# Altium PCB SignControlSchematic_v0.PcbDoc
Units mil, origin at the board's own origin, x right, y up, seen from the top; angles counter-clockwise.
Board outline 3938 x 3150 mil, 2 copper layers (Top, Bottom), stack 61.811 mil thick; 66 components, 135 nets, 377 pads, 0 vias.
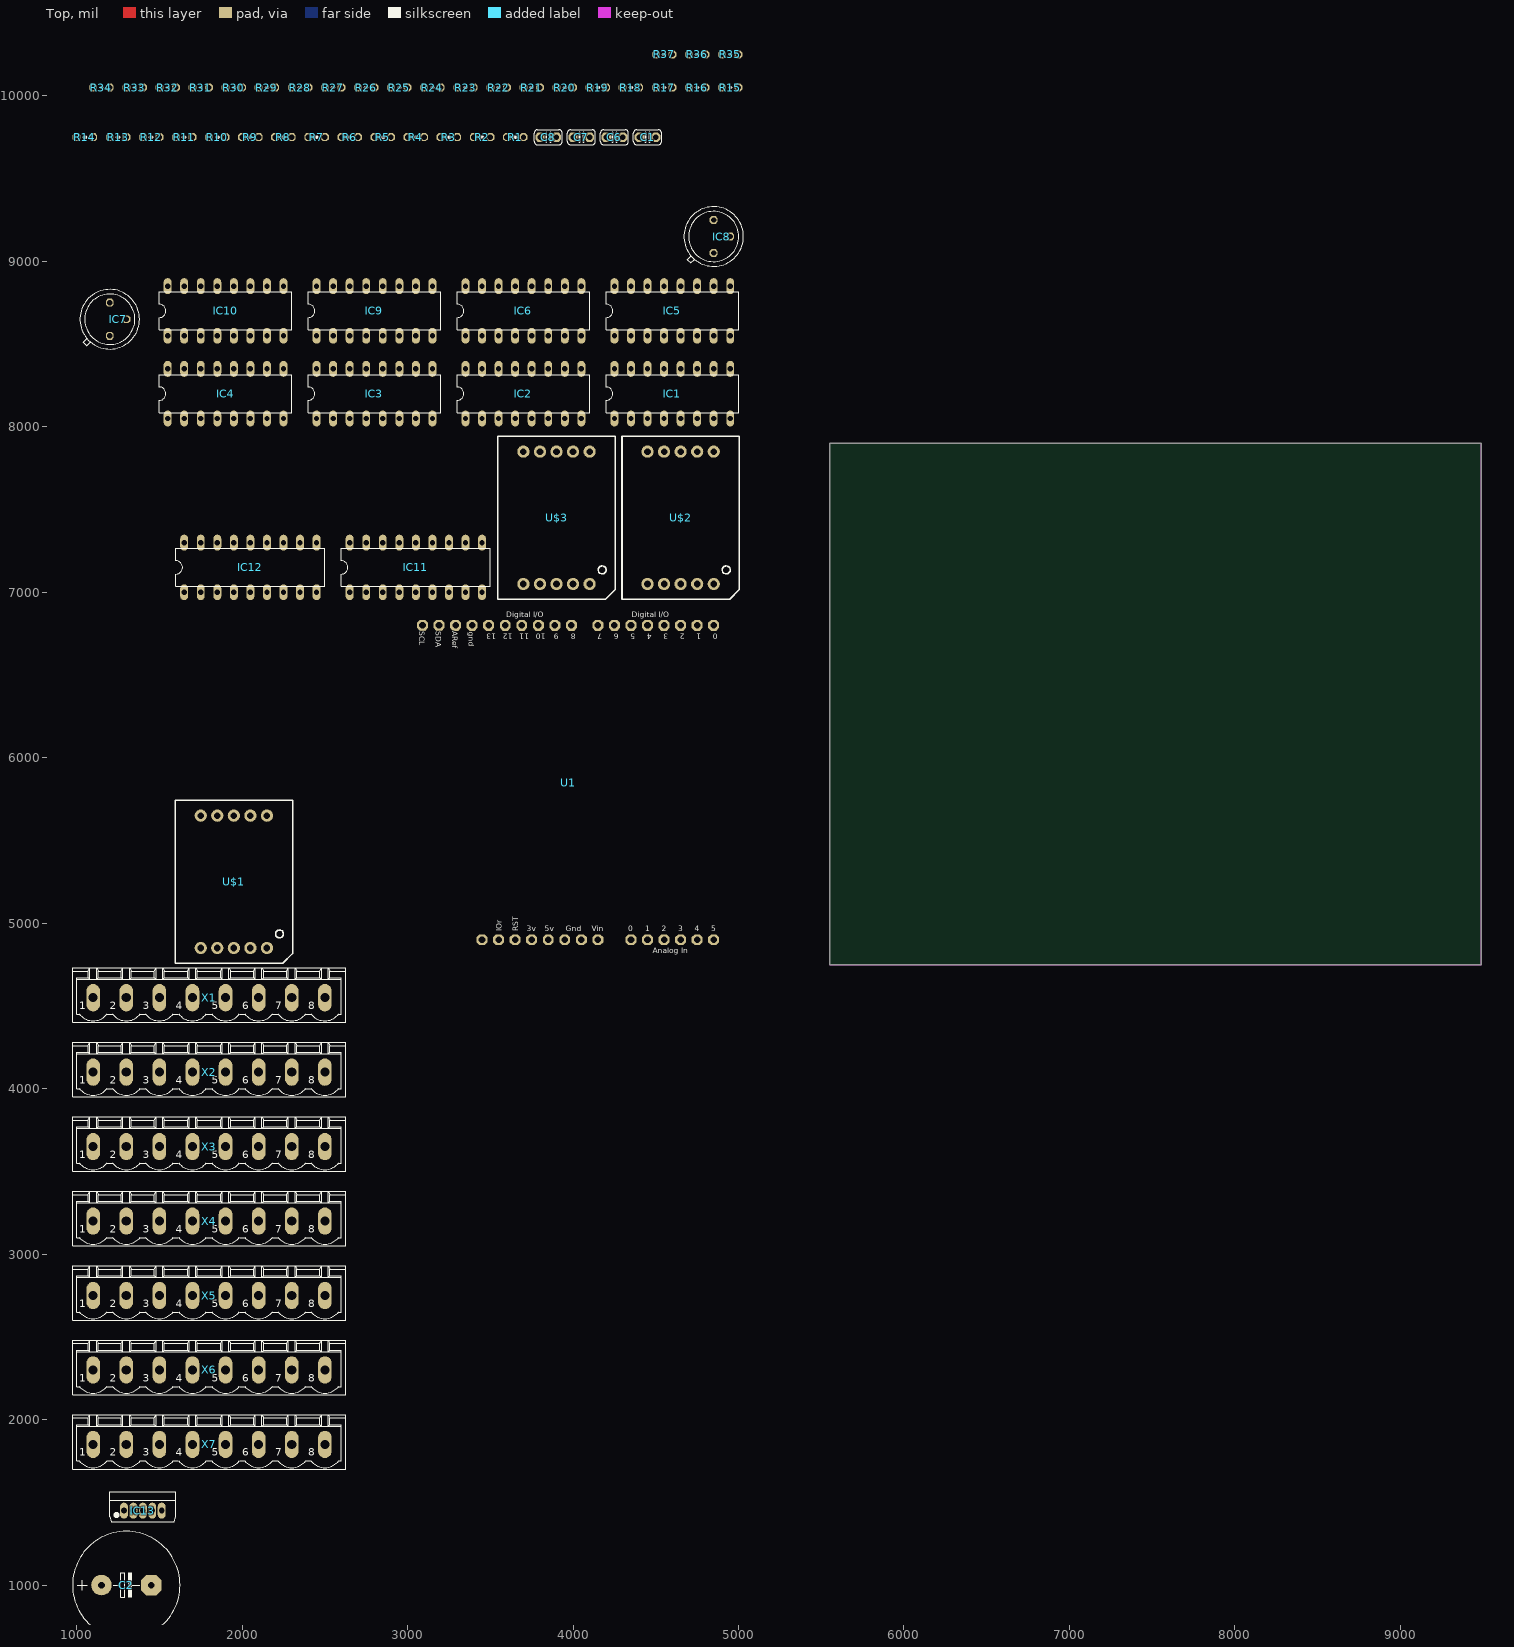
[diagram p0: Top view]
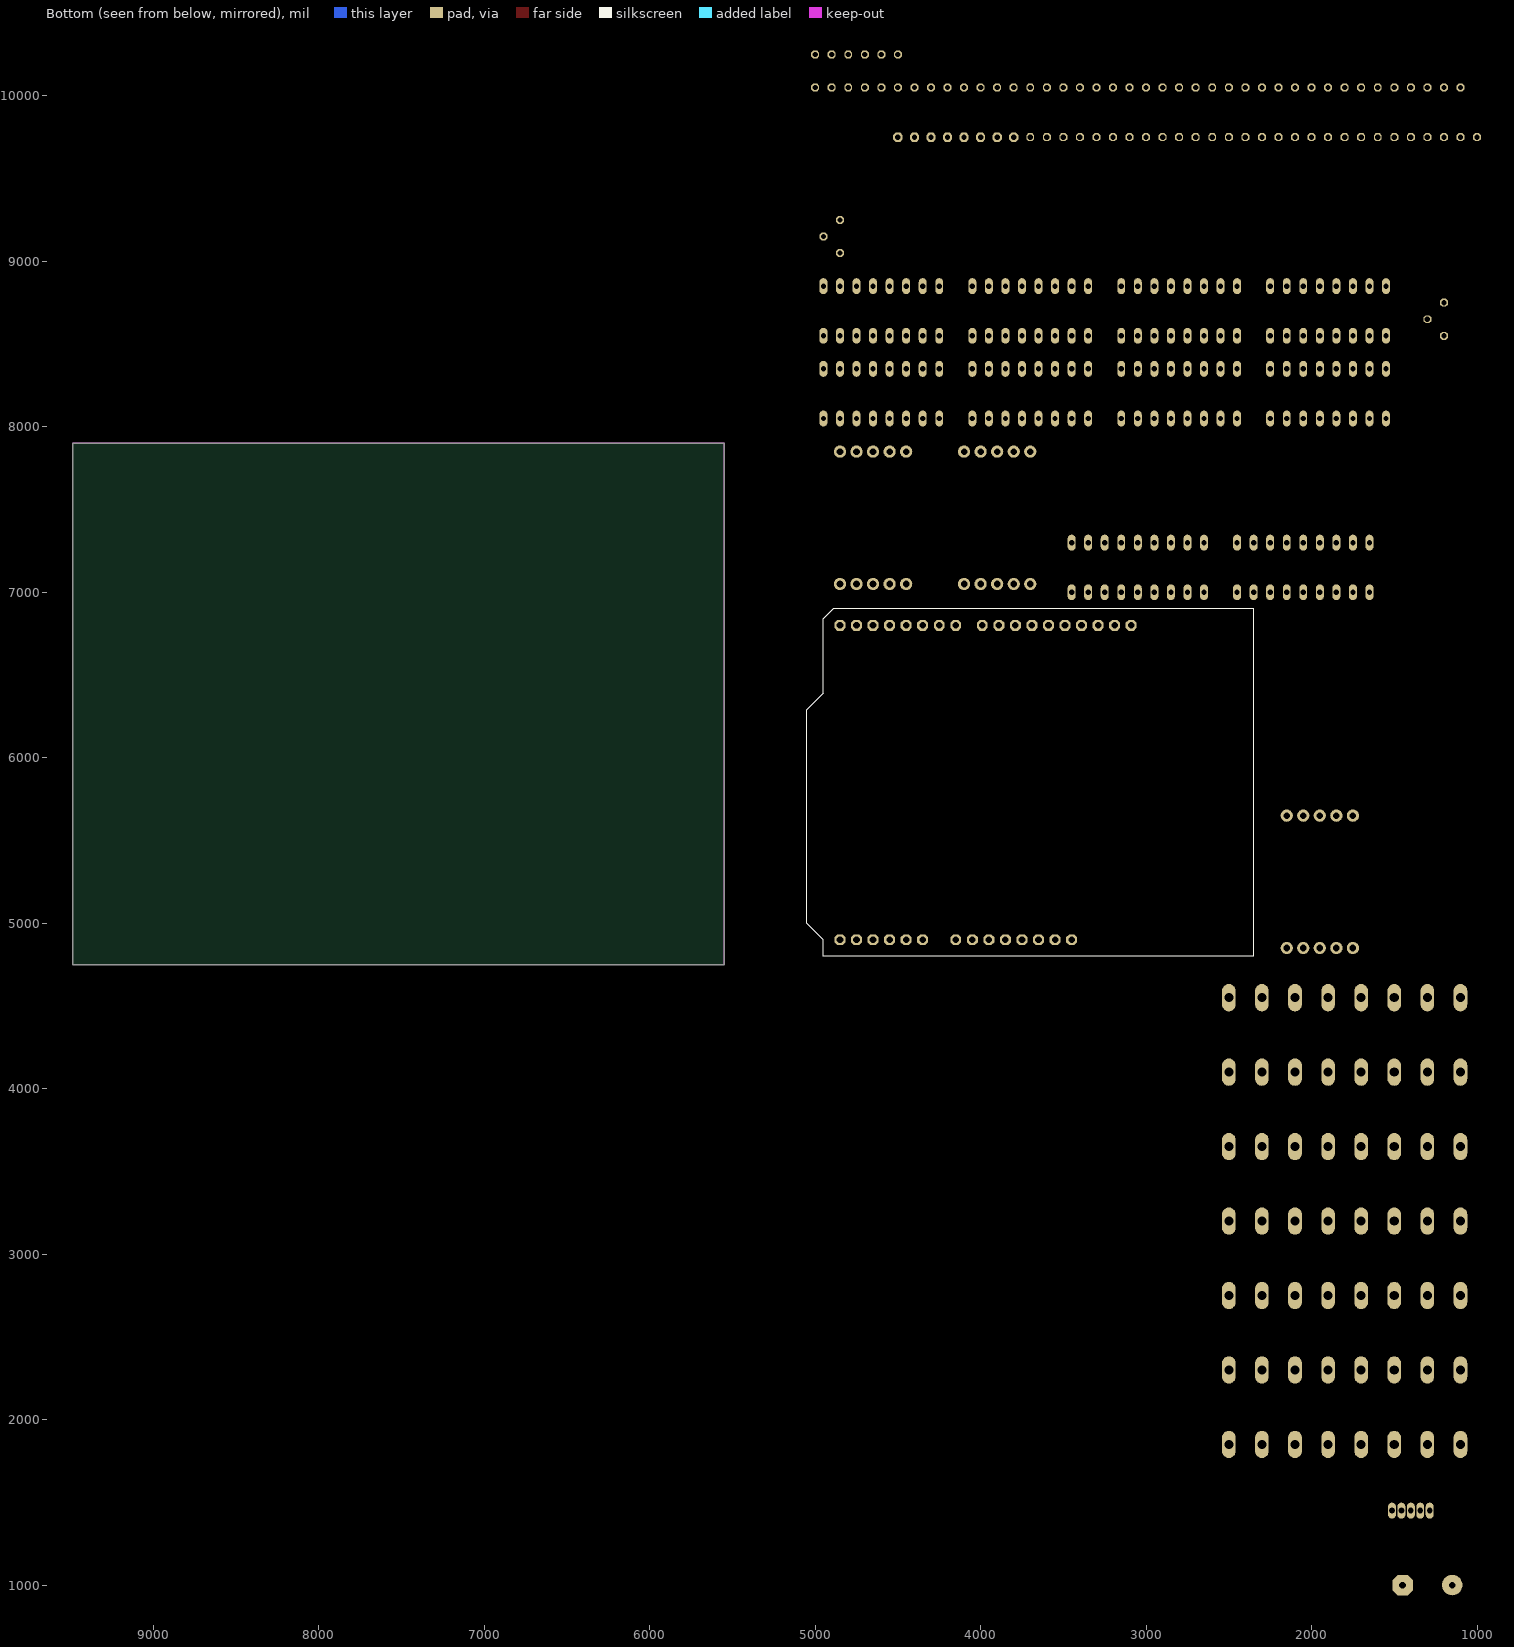
[diagram p1: Bottom view, seen from below]

## Layer stack, top to bottom
Top Solder: solder mask 0.4, Solder Resist, Dk 3.5
Top: signal copper 1.378
Dielectric 1: core 59.0551, FR-4, Dk 4.8
Bottom: signal copper 1.378
Bottom Solder: solder mask 0.4, Solder Resist, Dk 3.5

## Board outline
5550,4750 9488,4750 9488,7900 5550,7900

## Design rules (kind name [scope] priority, off if disabled: settings)
Clearance mdViaVia [IsVia vs IsVia] p1: gap=8
Clearance mdPadVia [IsPad vs IsVia] p2: gap=8
Clearance mdPadPad [IsPad vs IsPad] p3: gap=8
Clearance mdWireVia [(InLayerClass('Signal Layers') AND IsTrack) vs IsVia] p4: gap=8
Clearance mdWirePad [(InLayerClass('Signal Layers') AND IsTrack) vs IsPad] p5: gap=8
Clearance mdWireWire [(InLayerClass('Signal Layers') AND IsTrack) vs (InLayerClass('Signal Layers') AND IsTrack)] p6: gap=8
Clearance [All] p7: gap=8
HoleSize [All] p1: absolutevalues=TRUE maxlimit=100000 minlimit=24 maxpercent=80.000 minpercent=20.000
HoleToHoleClearance [All] p1: gap=8 allowstackedmicrovias=TRUE
PolygonConnect ThermalVias [IsVia] p1: connectstyle=Direct reliefconductorwidth=10 reliefentries=4 polygonreliefangle="90 Angle" airgapwidth=10
PolygonConnect [All] p2: connectstyle=Relief reliefconductorwidth=10 reliefentries=4 polygonreliefangle="90 Angle" airgapwidth=10
RoutingVias [All] p1: holewidth=28 width=50 viastyle="Through Hole" minholewidth=28 minwidth=50 maxholewidth=28 maxwidth=50
SilkToSilkClearance [All] p1 off: silktosilkclearance=10
SilkToSolderMaskClearance [IsPad] p1 off: minsilkscreentomaskgap=10 clearancetoexposedcopper=TRUE
SolderMaskExpansion [All] p1: expansion=4
Width [All] p1: maxlimit=100000 minlimit=10 preferedwidth=10
26 further rules are at their usual default settings.

## Components (designator, comment, footprint, x,y, rotation, side; value= is the part's Value field where it differs from the comment)
C1 "" C025-024X044 4450,9750 r0 top
C2 "" E7,5-16 1300,1000 r0 top
C6 "" C025-024X044 4250,9750 r0 top
C7 "" C025-024X044 4050,9750 r0 top
C8 "" C025-024X044 3850,9750 r0 top
IC1 "" DIL16 4600,8200 r0 top
IC2 "" DIL16 3700,8200 r0 top
IC3 "" DIL16 2800,8200 r0 top
IC4 "" DIL16 1900,8200 r0 top
IC5 "" DIL16 4600,8700 r0 top
IC6 "" DIL16 3700,8700 r0 top
IC7 "" TO39 1200,8650 r0 top
IC8 "" TO39 4850,9150 r0 top
IC9 "" DIL16 2800,8700 r0 top
IC10 "" DIL16 1900,8700 r0 top
IC11 "" DIL18 3050,7150 r0 top
IC12 "" DIL18 2050,7150 r0 top
IC13 "" TO-220-5_IN-LINE 1400,1450 r0 top
R1 "" 0204V 3650,9750 r0 top
R2 "" 0204V 3450,9750 r0 top
R3 "" 0204V 3250,9750 r0 top
R4 "" 0204V 3050,9750 r0 top
R5 "" 0204V 2850,9750 r0 top
R6 "" 0204V 2650,9750 r0 top
R7 "" 0204V 2450,9750 r0 top
R8 "" 0204V 2250,9750 r0 top
R9 "" 0204V 2050,9750 r0 top
R10 "" 0204V 1850,9750 r0 top
R11 "" 0204V 1650,9750 r0 top
R12 "" 0204V 1450,9750 r0 top
R13 "" 0204V 1250,9750 r0 top
R14 "" 0204V 1050,9750 r0 top
R15 "" 0204V 4950,10050 r0 top
R16 "" 0204V 4750,10050 r0 top
R17 "" 0204V 4550,10050 r0 top
R18 "" 0204V 4350,10050 r0 top
R19 "" 0204V 4150,10050 r0 top
R20 "" 0204V 3950,10050 r0 top
R21 "" 0204V 3750,10050 r0 top
R22 "" 0204V 3550,10050 r0 top
R23 "" 0204V 3350,10050 r0 top
R24 "" 0204V 3150,10050 r0 top
R25 "" 0204V 2950,10050 r0 top
R26 "" 0204V 2750,10050 r0 top
R27 "" 0204V 2550,10050 r0 top
R28 "" 0204V 2350,10050 r0 top
R29 "" 0204V 2150,10050 r0 top
R30 "" 0204V 1950,10050 r0 top
R31 "" 0204V 1750,10050 r0 top
R32 "" 0204V 1550,10050 r0 top
R33 "" 0204V 1350,10050 r0 top
R34 "" 0204V 1150,10050 r0 top
R35 "" 0204V 4950,10250 r0 top
R36 "" 0204V 4750,10250 r0 top
R37 "" 0204V 4550,10250 r0 top
U1 "" ARDUINOR3-BPLACE 2350,4800 r0 top
U$1 "" "7-SEGMENT-1\"PTH" 1950,5250 r0 top
U$2 "" "7-SEGMENT-1\"PTH" 4650,7450 r0 top
U$3 "" "7-SEGMENT-1\"PTH" 3900,7450 r0 top
X1 "" MSTBV8 1800,4550 r0 top
X2 "" MSTBV8 1800,4100 r0 top
X3 "" MSTBV8 1800,3650 r0 top
X4 "" MSTBV8 1800,3200 r0 top
X5 "" MSTBV8 1800,2750 r0 top
X6 "" MSTBV8 1800,2300 r0 top
X7 "" MSTBV8 1800,1850 r0 top

## Footprints (in the part's own frame and the unit in brackets; to place one, negate y for a bottom-side part, rotate by r counter-clockwise, add the part's x,y. Pads: shape width x height; smd on the part's side, far side on the other; paste and mask are expansions set on the pad)
"7-SEGMENT-1\"PTH" [mil] "7-SEGMENT-1\"PTH"
  round 74 hole 40: 1(-200,-400) 2(-100,-400) 3(0,-400) 4(100,-400) 5(200,-400) 6(200,400) 7(100,400) 8(0,400) 9(-100,400) 10(-200,400)
  silkscreen extent -354,-492 355,493
0204V [mil] "0204V"
  oct 48x48 hole 32: 1(-50,0) 2(50,0)
  silkscreen extent -5,0 5,0
ARDUINOR3-BPLACE [mil] "ARDUINOR3-BPLACE"
  oct 66x66 hole 40: 3V(1400,100) 5V(1500,100) A0(2000,100) A1(2100,100) A2(2200,100) A3(2300,100) A4(2400,100) A5(2500,100) AREF(940,2000) D0(2500,2000) D1(2400,2000) D2(2300,2000) D3(2200,2000) D4(2100,2000) D5(2000,2000) D6(1900,2000) D7(1800,2000) D8(1640,2000) D9(1540,2000) D10(1440,2000) D11(1340,2000) D12(1240,2000) D13(1140,2000) GND(1040,2000) GND1(1700,100) GND2(1600,100) IOREF(1200,100) RESERVED(1100,100) RESET(1300,100) SCL(740,2000) SDA(840,2000) VIN(1800,100)
C025-024X044 [mil] "C025-024X044"
  oct 56x56 hole 32: 1(-50,0) 2(50,0)
  silkscreen extent -85,-45 85,45
DIL16 [mil] "DIL16"
  oval 48x96 hole 32: 1(-350,-150) 2(-250,-150) 3(-150,-150) 4(-50,-150) 5(50,-150) 6(150,-150) 7(250,-150) 8(350,-150) 9(350,150) 10(250,150) 11(150,150) 12(50,150) 13(-50,150) 14(-150,150) 15(-250,150) 16(-350,150)
  silkscreen extent -400,-115 400,115
DIL18 [mil] "DIL18"
  oval 48x96 hole 32: 1(-400,-150) 2(-300,-150) 3(-200,-150) 4(-100,-150) 5(0,-150) 6(100,-150) 7(200,-150) 8(300,-150) 9(400,-150) 10(400,150) 11(300,150) 12(200,150) 13(100,150) 14(0,150) 15(-100,150) 16(-200,150) 17(-300,150) 18(-400,150)
  silkscreen extent -450,-115 450,115
E7,5-16 [mil] "E7,5-16"
  round 124 hole 40: +(-150,0)
  oct 124x124 hole 40: -(150,0)
  silkscreen extent -325,-325 325,325
MSTBV8 [mil] "MSTBV8"
  oval 82.5x165 hole 55: 1(-700,0) 2(-500,0) 3(-300,0) 4(-100,0) 5(100,0) 6(300,0) 7(500,0) 8(700,0)
  silkscreen extent -825,-150 825,180
TO39 [mil] "TO39"
  oct 48x48 hole 32: 1(0,-100) 2(100,0) 3(0,100)
  silkscreen extent -180,-180 180,180
TO-220-5_IN-LINE [mil] "TO-220-5_IN-LINE"
  oval 48x96 hole 35: P$1(-114,0) P$2(-57,0) P$3(0,0) P$4(57,0) P$5(114,0)
  silkscreen extent -200,-67 200,113

## Part data
C1 C6 C7 C8: library part C025-024X044
C2: library part E7,5-16
IC1 IC2 IC3 IC4 IC5 IC6 IC9 IC10: library part DIL16
IC7 IC8: library part TO39
IC11 IC12: library part DIL18
IC13: library part TO-220-5_IN-LINE
R1 R2 R3 R4 R5 R6 R7 R8 R9 R10 R11 R12 R13 R14 R15 R16 R17 R18 R19 R20 R21 R22 R23 R24 R25 R26 R27 R28 R29 R30 R31 R32 R33 R34 R35 R36 R37: library part 0204V
U1: library part ARDUINOR3-BPLACE
U$1 U$2 U$3: library part "7-SEGMENT-1\"PTH"
X1 X2 X3 X4 X5 X6 X7: library part MSTBV8

## Nets (pads, with @x,y where several pads share a name; then routed paths per layer and width w, separated by ;. In a path a pad name is that pad's centre, name@x,y a point inside that pad or via, vN(x,y) a via of type N, cw(c..) or ccw(c..) an arc to the next point about the centre after c; other vN are vias at no path point)
3V: U1.3V
5V: C8.1 IC8.2 U1.5V U1.VIN
12V: C6.1 IC7.2 X2.1 X2.2 X2.3 X2.4 X2.5 X2.6 X2.7 X2.8 X4.1 X4.2 X4.3 X4.4 X4.5 X4.7 X4.8 X5.8 X6.8
A: IC1.5 IC3.5 IC5.5 U1.D0
B: IC1.3 IC3.3 IC5.3 U1.D1
BAT+: C1.1 C7.1 IC7.1 IC8.1
BL: IC1.7 IC3.7 IC5.7 U1.D4
C: IC1.2 IC3.2 IC5.2 U1.D2
D: IC1.4 IC3.4 IC5.4 U1.D3
GND: C1.2 C2.- C6.2 C7.2 C8.2 IC1.6 IC2.8 IC3.6 IC4.8 IC5.6 IC6.8 IC7.3 IC8.3 IC9.8 IC9.13 IC10.8 IC10.13 IC11.9 IC12.9 IC13.P$3 IC13.P$5 U1.GND
GND1: U1.GND1
GND2: U1.GND2
LD0: IC1.1 U1.D5
LD1: IC3.1 U1.D6
LD2: IC5.1 U1.D7
N$1: IC1.9 IC2.1
N$2: IC2.16 R1.1
N$3: IC1.10 IC2.2
N$4: R1.2 X5.1
N$5: IC1.11 IC2.3
N$6: IC2.15 R2.1
N$7: IC1.12 IC2.4
N$8: R2.2 X5.2
N$9: IC1.13 IC2.5
N$10: IC2.14 R3.1
N$11: IC1.15 IC2.6
N$12: IC1.14 IC2.7
N$13: R3.2 X5.3
N$14: R4.2 X5.4
N$15: IC3.9 IC4.1
N$16: IC2.13 R4.1
N$17: IC3.10 IC4.2
N$18: IC2.12 R5.1
N$19: IC3.11 IC4.3
N$20: R5.2 X5.5
N$21: IC3.12 IC4.4
N$22: R6.2 X5.6
N$23: IC3.13 IC4.5
N$24: IC2.11 R6.1
N$25: IC3.15 IC4.6
N$26: IC3.14 IC4.7
N$27: IC2.10 R7.1
N$28: R7.2 X5.7
N$29: IC5.9 IC6.1
N$30: IC4.16 R8.1
N$31: IC5.10 IC6.2
N$32: R8.2 X6.1
N$33: IC5.11 IC6.3
N$34: R9.2 X6.2
N$35: IC5.12 IC6.4
N$36: IC4.15 R9.1
N$37: IC5.13 IC6.5
N$38: IC4.14 R10.1
N$39: IC5.15 IC6.6
N$40: IC5.14 IC6.7
N$41: R10.2 X6.3
N$42: R11.2 X6.4
N$43: IC4.13 R11.1
N$44: IC4.12 R12.1
N$45: R12.2 X6.5
N$46: R13.2 X6.6
N$47: IC4.11 R13.1
N$48: IC4.10 R14.1
N$49: R14.2 X6.7
N$50: IC6.16 R15.1
N$51: R15.2 X7.1
N$52: X7.2
N$53: IC6.15 R16.1
N$54: IC6.14 R17.1
N$55: R17.2 X7.3
N$56: R18.2
N$57: IC6.13 R18.1
N$58: IC6.12 R19.1
N$59: R19.2 X7.5
N$60: R20.2 X7.6
N$61: IC6.11 R20.1
N$62: IC6.10 R21.1
N$63: R21.2 X7.7
N$64: R22.2 X3.1
N$65: R23.2 X3.2
N$66: R24.2 X3.3
N$67: R25.2 X3.4
N$68: R26.2 X3.5
N$69: R27.2 X3.6
N$70: R28.2 X3.7
N$71: R29.2 X3.8
N$72: R30.2 X1.1
N$73: R31.2 X1.2
N$74: R32.2 X1.3
N$75: R33.2 X1.4
N$76: R34.2 X1.5
N$77: R35.2 X1.6
N$78: R36.2 X1.7
N$79: R37.2 X1.8
N$80: IC11.18 R22.1
N$81: IC11.17 R23.1
N$82: IC11.16 R24.1
N$83: IC11.15 R25.1
N$84: IC11.14 R26.1
N$85: IC11.13 R27.1
N$86: IC11.12 R28.1
N$87: IC11.11 R29.1
N$88: IC12.18 R30.1
N$89: IC12.17 R31.1
N$90: IC12.16 R32.1
N$91: IC12.15 R33.1
N$92: IC12.14 R34.1
N$93: IC12.13 R35.1
N$94: IC12.12 R36.1
N$95: IC12.11 R37.1
N$96: IC9.9 IC10.14
N$97: IC9.15 IC11.1
N$98: IC9.1 IC11.2
N$99: IC9.2 IC11.3
N$100: IC9.3 IC11.4
N$101: IC9.4 IC11.5
N$102: IC9.5 IC11.6
N$103: IC9.6 IC11.7
N$104: IC9.7 IC11.8
N$105: IC10.15 IC12.1
N$106: IC10.1 IC12.2
N$107: IC10.2 IC12.3
N$108: IC10.3 IC12.4
N$109: IC10.4 IC12.5
N$110: IC10.5 IC12.6
N$111: IC10.6 IC12.7
N$112: IC10.7 IC12.8
N$113: C2.+ IC13.P$1
RCK: IC9.12 IC10.12 U1.D11
SCK: IC9.11 IC10.11 U1.D9
SCL: IC9.10 IC10.10 U1.D10
SER: IC9.14 U1.D8
VCC: IC9.16 IC10.16
VDD: IC1.16 IC3.16 IC5.16
VSS: IC1.8 IC3.8 IC5.8
pads on no net: IC2.9 IC4.9 IC6.9 IC10.9 IC11.10 IC12.10 IC13.P$2 IC13.P$4 R16.2 U1.A0 U1.A1 U1.A2 U1.A3 U1.A4 U1.A5 U1.AREF U1.D12 U1.D13 U1.IOREF U1.RESERVED U1.RESET U1.SCL U1.SDA U$1.1 U$1.2 U$1.3 U$1.4 U$1.5 U$1.6 U$1.7 U$1.8 U$1.9 U$1.10 U$2.1 U$2.2 U$2.3 U$2.4 U$2.5 U$2.6 U$2.7 U$2.8 U$2.9 U$2.10 U$3.1 U$3.2 U$3.3 U$3.4 U$3.5 U$3.6 U$3.7 U$3.8 U$3.9 U$3.10 X4.6 X7.4 X7.8

## Keep-outs
Keep-Out Layer:
  the board outline again, w0

## Silkscreen, mask and mechanical layers (free items; w line width, h text height)
Dimension:
  the board outline again, w0
Unrouted:
  drawing of 186 lines, arcs and shapes, not listed

## Text inside footprints (layer, text, board x,y; h text height)
C1: tNames ">NAME" at 4380,9805 h77.5; tValues ">VALUE" at 4380,9645 h77.5
C2: tNames ">NAME" at 1610,1150 h108.5; tValues ">VALUE" at 1100,831 h108.5
C6: tNames ">NAME" at 4180,9805 h77.5; tValues ">VALUE" at 4180,9645 h77.5
C7: tNames ">NAME" at 3980,9805 h77.5; tValues ">VALUE" at 3980,9645 h77.5
C8: tNames ">NAME" at 3780,9805 h77.5; tValues ">VALUE" at 3780,9645 h77.5
IC1: tNames ">NAME" at 4185,8085 h77.5 r90; tValues ">VALUE" at 4305,8175 h77.5
IC2: tNames ">NAME" at 3285,8085 h77.5 r90; tValues ">VALUE" at 3405,8175 h77.5
IC3: tNames ">NAME" at 2385,8085 h77.5 r90; tValues ">VALUE" at 2505,8175 h77.5
IC4: tNames ">NAME" at 1485,8085 h77.5 r90; tValues ">VALUE" at 1605,8175 h77.5
IC5: tNames ">NAME" at 4185,8585 h77.5 r90; tValues ">VALUE" at 4305,8675 h77.5
IC6: tNames ">NAME" at 3285,8585 h77.5 r90; tValues ">VALUE" at 3405,8675 h77.5
IC7: tNames ">NAME" at 1090,8840 h77.5; tValues ">VALUE" at 1070,8625 h77.5
IC8: tNames ">NAME" at 4740,9340 h77.5; tValues ">VALUE" at 4720,9125 h77.5
IC9: tNames ">NAME" at 2385,8585 h77.5 r90; tValues ">VALUE" at 2505,8675 h77.5
IC10: tNames ">NAME" at 1485,8585 h77.5 r90; tValues ">VALUE" at 1605,8675 h77.5
IC11: tNames ">NAME" at 2590,7030 h77.5 r90; tValues ">VALUE" at 2675,7125 h77.5
IC12: tNames ">NAME" at 1590,7030 h77.5 r90; tValues ">VALUE" at 1675,7125 h77.5
IC13: tNames ">NAME" at 975,1475 h42.5; tValues ">VALUE" at 1275,1325 h42.5
R1: tNames ">NAME" at 3566,9796 h77.5; tValues ">VALUE" at 3566,9659 h77.5
R2: tNames ">NAME" at 3366,9796 h77.5; tValues ">VALUE" at 3366,9659 h77.5
R3: tNames ">NAME" at 3166,9796 h77.5; tValues ">VALUE" at 3166,9659 h77.5
R4: tNames ">NAME" at 2966,9796 h77.5; tValues ">VALUE" at 2966,9659 h77.5
R5: tNames ">NAME" at 2766,9796 h77.5; tValues ">VALUE" at 2766,9659 h77.5
R6: tNames ">NAME" at 2566,9796 h77.5; tValues ">VALUE" at 2566,9659 h77.5
R7: tNames ">NAME" at 2366,9796 h77.5; tValues ">VALUE" at 2366,9659 h77.5
R8: tNames ">NAME" at 2166,9796 h77.5; tValues ">VALUE" at 2166,9659 h77.5
R9: tNames ">NAME" at 1966,9796 h77.5; tValues ">VALUE" at 1966,9659 h77.5
R10: tNames ">NAME" at 1766,9796 h77.5; tValues ">VALUE" at 1766,9659 h77.5
R11: tNames ">NAME" at 1566,9796 h77.5; tValues ">VALUE" at 1566,9659 h77.5
R12: tNames ">NAME" at 1366,9796 h77.5; tValues ">VALUE" at 1366,9659 h77.5
R13: tNames ">NAME" at 1166,9796 h77.5; tValues ">VALUE" at 1166,9659 h77.5
R14: tNames ">NAME" at 966,9796 h77.5; tValues ">VALUE" at 966,9659 h77.5
R15: tNames ">NAME" at 4866,10096 h77.5; tValues ">VALUE" at 4866,9959 h77.5
R16: tNames ">NAME" at 4666,10096 h77.5; tValues ">VALUE" at 4666,9959 h77.5
R17: tNames ">NAME" at 4466,10096 h77.5; tValues ">VALUE" at 4466,9959 h77.5
R18: tNames ">NAME" at 4266,10096 h77.5; tValues ">VALUE" at 4266,9959 h77.5
R19: tNames ">NAME" at 4066,10096 h77.5; tValues ">VALUE" at 4066,9959 h77.5
R20: tNames ">NAME" at 3866,10096 h77.5; tValues ">VALUE" at 3866,9959 h77.5
R21: tNames ">NAME" at 3666,10096 h77.5; tValues ">VALUE" at 3666,9959 h77.5
R22: tNames ">NAME" at 3466,10096 h77.5; tValues ">VALUE" at 3466,9959 h77.5
R23: tNames ">NAME" at 3266,10096 h77.5; tValues ">VALUE" at 3266,9959 h77.5
R24: tNames ">NAME" at 3066,10096 h77.5; tValues ">VALUE" at 3066,9959 h77.5
R25: tNames ">NAME" at 2866,10096 h77.5; tValues ">VALUE" at 2866,9959 h77.5
R26: tNames ">NAME" at 2666,10096 h77.5; tValues ">VALUE" at 2666,9959 h77.5
R27: tNames ">NAME" at 2466,10096 h77.5; tValues ">VALUE" at 2466,9959 h77.5
R28: tNames ">NAME" at 2266,10096 h77.5; tValues ">VALUE" at 2266,9959 h77.5
R29: tNames ">NAME" at 2066,10096 h77.5; tValues ">VALUE" at 2066,9959 h77.5
R30: tNames ">NAME" at 1866,10096 h77.5; tValues ">VALUE" at 1866,9959 h77.5
R31: tNames ">NAME" at 1666,10096 h77.5; tValues ">VALUE" at 1666,9959 h77.5
R32: tNames ">NAME" at 1466,10096 h77.5; tValues ">VALUE" at 1466,9959 h77.5
R33: tNames ">NAME" at 1266,10096 h77.5; tValues ">VALUE" at 1266,9959 h77.5
R34: tNames ">NAME" at 1066,10096 h77.5; tValues ">VALUE" at 1066,9959 h77.5
R35: tNames ">NAME" at 4866,10296 h77.5; tValues ">VALUE" at 4866,10159 h77.5
R36: tNames ">NAME" at 4666,10296 h77.5; tValues ">VALUE" at 4666,10159 h77.5
R37: tNames ">NAME" at 4466,10296 h77.5; tValues ">VALUE" at 4466,10159 h77.5
U1: Top Overlay "RST" at 3670,4950 h34 r90; Top Overlay "3v" at 3719,4950 h34; Top Overlay "5v" at 3829,4950 h34; Top Overlay "Gnd" at 3956,4950 h34; Top Overlay "Vin" at 4114,4950 h34; Top Overlay "Analog In" at 4481,4819 h34; Top Overlay "0" at 4335,4950 h34; Top Overlay "1" at 4435,4950 h34; Top Overlay "2" at 4535,4950 h34; Top Overlay "3" at 4635,4950 h34; Top Overlay "4" at 4735,4950 h34; Top Overlay "5" at 4835,4950 h34; Top Overlay "ARef" at 3270,6765 h34 r270; Top Overlay "gnd" at 3370,6760 h34 r270; Top Overlay "13" at 3535,6750 h34 r180; Top Overlay "12" at 3635,6750 h34 r180; Top Overlay "11" at 3735,6750 h34 r180; Top Overlay "10" at 3835,6750 h34 r180; Top Overlay "9" at 3915,6750 h34 r180; Top Overlay "8" at 4015,6750 h34 r180; Top Overlay "7" at 4175,6750 h34 r180; Top Overlay "6" at 4275,6750 h34 r180; Top Overlay "5" at 4375,6750 h34 r180; Top Overlay "4" at 4475,6750 h34 r180; Top Overlay "3" at 4575,6750 h34 r180; Top Overlay "2" at 4675,6750 h34 r180; Top Overlay "1" at 4775,6750 h34 r180; Top Overlay "0" at 4875,6750 h34 r180; Top Overlay "Digital I/O" at 3595,6850 h34; Top Overlay "Digital I/O" at 4355,6850 h34; Top Overlay "SCL" at 3070,6765 h34 r270; Top Overlay "SDA" at 3170,6765 h34 r270; Top Overlay "IOr" at 3570,4950 h34 r90
X1: tNames ">NAME" at 975,4310 h108.5; tValues ">VALUE" at 1300,4310 h108.5; Top Overlay "1" at 1015,4465 h77.5; Top Overlay "2" at 1200,4465 h77.5; Top Overlay "3" at 1400,4465 h77.5; Top Overlay "4" at 1600,4465 h77.5; Top Overlay "5" at 1815,4465 h77.5; Top Overlay "6" at 2000,4465 h77.5; Top Overlay "7" at 2200,4465 h77.5; Top Overlay "8" at 2400,4465 h77.5
X2: tNames ">NAME" at 975,3860 h108.5; tValues ">VALUE" at 1300,3860 h108.5; Top Overlay "1" at 1015,4015 h77.5; Top Overlay "2" at 1200,4015 h77.5; Top Overlay "3" at 1400,4015 h77.5; Top Overlay "4" at 1600,4015 h77.5; Top Overlay "5" at 1815,4015 h77.5; Top Overlay "6" at 2000,4015 h77.5; Top Overlay "7" at 2200,4015 h77.5; Top Overlay "8" at 2400,4015 h77.5
X3: tNames ">NAME" at 975,3410 h108.5; tValues ">VALUE" at 1300,3410 h108.5; Top Overlay "1" at 1015,3565 h77.5; Top Overlay "2" at 1200,3565 h77.5; Top Overlay "3" at 1400,3565 h77.5; Top Overlay "4" at 1600,3565 h77.5; Top Overlay "5" at 1815,3565 h77.5; Top Overlay "6" at 2000,3565 h77.5; Top Overlay "7" at 2200,3565 h77.5; Top Overlay "8" at 2400,3565 h77.5
X4: tNames ">NAME" at 975,2960 h108.5; tValues ">VALUE" at 1300,2960 h108.5; Top Overlay "1" at 1015,3115 h77.5; Top Overlay "2" at 1200,3115 h77.5; Top Overlay "3" at 1400,3115 h77.5; Top Overlay "4" at 1600,3115 h77.5; Top Overlay "5" at 1815,3115 h77.5; Top Overlay "6" at 2000,3115 h77.5; Top Overlay "7" at 2200,3115 h77.5; Top Overlay "8" at 2400,3115 h77.5
X5: tNames ">NAME" at 975,2510 h108.5; tValues ">VALUE" at 1300,2510 h108.5; Top Overlay "1" at 1015,2665 h77.5; Top Overlay "2" at 1200,2665 h77.5; Top Overlay "3" at 1400,2665 h77.5; Top Overlay "4" at 1600,2665 h77.5; Top Overlay "5" at 1815,2665 h77.5; Top Overlay "6" at 2000,2665 h77.5; Top Overlay "7" at 2200,2665 h77.5; Top Overlay "8" at 2400,2665 h77.5
X6: tNames ">NAME" at 975,2060 h108.5; tValues ">VALUE" at 1300,2060 h108.5; Top Overlay "1" at 1015,2215 h77.5; Top Overlay "2" at 1200,2215 h77.5; Top Overlay "3" at 1400,2215 h77.5; Top Overlay "4" at 1600,2215 h77.5; Top Overlay "5" at 1815,2215 h77.5; Top Overlay "6" at 2000,2215 h77.5; Top Overlay "7" at 2200,2215 h77.5; Top Overlay "8" at 2400,2215 h77.5
X7: tNames ">NAME" at 975,1610 h108.5; tValues ">VALUE" at 1300,1610 h108.5; Top Overlay "1" at 1015,1765 h77.5; Top Overlay "2" at 1200,1765 h77.5; Top Overlay "3" at 1400,1765 h77.5; Top Overlay "4" at 1600,1765 h77.5; Top Overlay "5" at 1815,1765 h77.5; Top Overlay "6" at 2000,1765 h77.5; Top Overlay "7" at 2200,1765 h77.5; Top Overlay "8" at 2400,1765 h77.5